# Altium PCB Placa 2.PcbDoc
Units mm, origin at the board's own origin, x right, y up, seen from the top; angles counter-clockwise.
Board outline 64 x 64 mm, 2 copper layers (Top Layer, Bottom Layer); 3 components, 4 nets, 11 pads, 0 vias.
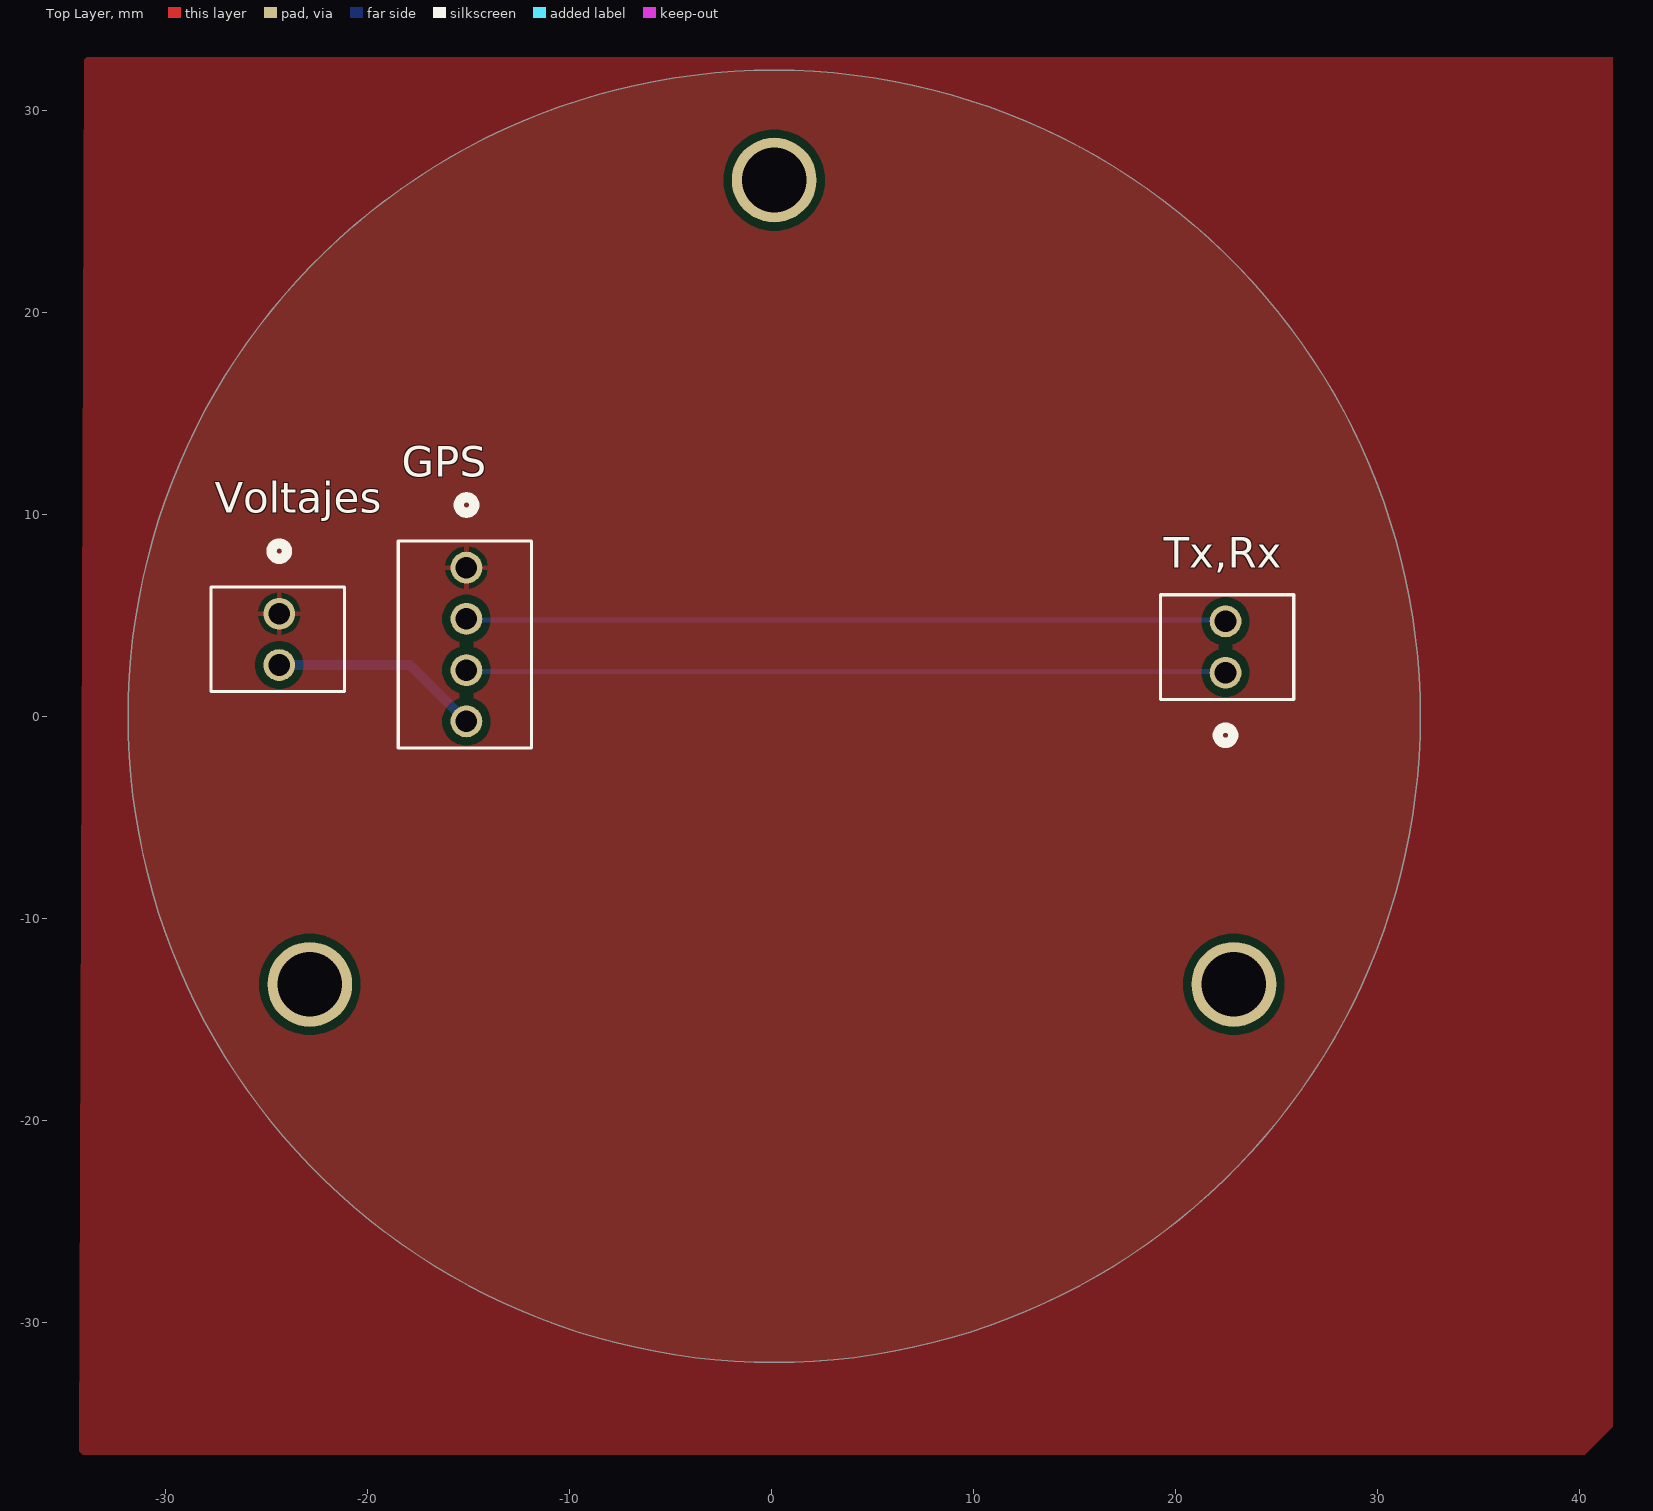
[diagram p0: Top Layer view]
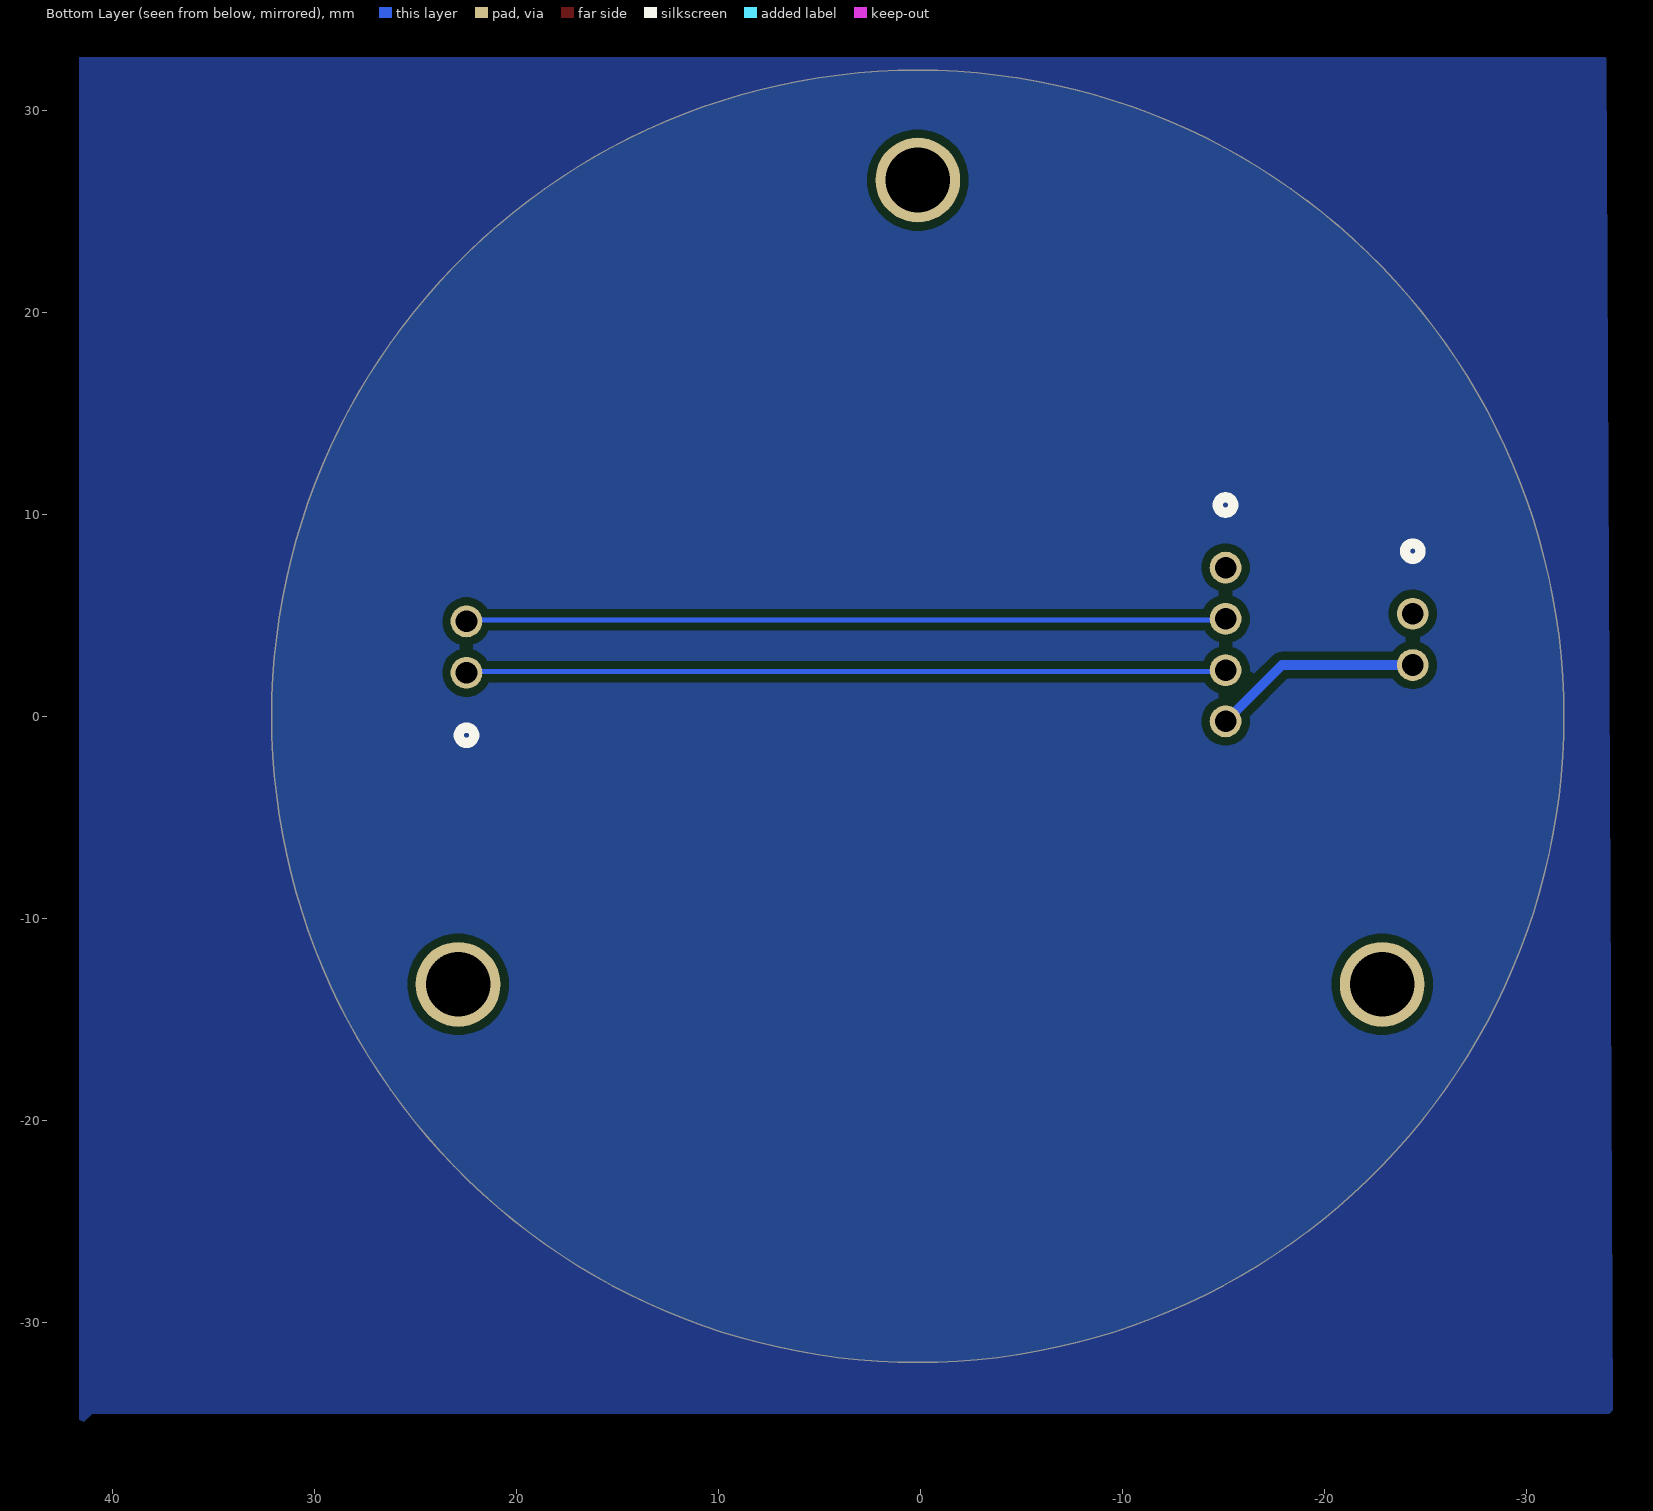
[diagram p1: Bottom Layer view, seen from below]

## Layer stack, top to bottom
Top Solder: solder mask 0.0102, Solder Resist, Dk 3.5
Top Layer: signal copper 0.0356
Dielectric 1: dielectric 0.32, FR-4, Dk 4.8
Bottom Layer: signal copper 0.0356
Bottom Solder: solder mask 0.0102, Solder Resist, Dk 3.5

## Board outline
-31.873,0 ccw(c0.127,0) 0.127,-32 ccw(c0.127,0) 32.127,0 ccw(c0.127,0) 0.127,32 ccw(c0.127,0)

## Design rules (kind name [scope] priority, off if disabled: settings)
Clearance [All] p1: gap=0.4 ignorepadtopadclearanceinfootprint=FALSE
HoleSize [All] p1: absolutevalues=TRUE maxlimit=6 minlimit=0.025 maxpercent=80.000 minpercent=20.000
PolygonConnect [All] p1: connectstyle=Relief reliefconductorwidth=0.254 reliefentries=4 polygonreliefangle="90 Angle" airgapwidth=0.254
RoutingVias [All] p1: holewidth=0.711 width=1.27 viastyle="Through Hole" minholewidth=0.711 minwidth=1.27 maxholewidth=0.711 maxwidth=1.27
SolderMaskExpansion [All] p1: expansion=0 istentingtop=FALSE
Width [All] p1: maxlimit=0.5 minlimit=0.254 preferedwidth=0.5
29 further rules are at their usual default settings.

## Components (designator, comment, footprint, x,y, rotation, side; value= is the part's Value field where it differs from the comment)
GPS "22112042" CONN_A-6373-04A_MOL -15.113,7.366 r270 top
Tx,Rx "22232021" CONN_A-6373-02A_MOL 22.479,2.159 r90 top
Voltajes "22232021" CONN_A-6373-02A_MOL -24.384,5.08 r270 top

## Footprints (in the part's own frame and the unit in brackets; to place one, negate y for a bottom-side part, rotate by r counter-clockwise, add the part's x,y. Pads: shape width x height; smd on the part's side, far side on the other; paste and mask are expansions set on the pad)
CONN_A-6373-02A_MOL [mil]
  round 62 hole 42: 1(0,0) 2(100,0)
  silkscreen extent -137,-133 152,127
CONN_A-6373-04A_MOL [mil]
  round 62 hole 42: 1(0,0) 2(100,0) 3(200,0) 4(300,0)
  silkscreen extent -137,-133 352,127

## Part data
GPS: Package=None, Availability=Unavailable, MP=22112042, Price=None
Tx,Rx Voltajes: "Connector Header Through Hole 2 position 0.100 (2.54mm)", Package=None, Check_prices=https://www.snapeda.com/parts/22232021/Molex/view-part/?ref=eda, MF=Molex, MP=22232021, SnapEDA_Link=https://www.snapeda.com/parts/22232021/Molex/view-part/?ref=snap

## Free pads (board coordinates)
  round 4.2 hole 3.2: ""(-22.87,-13.279) ""(0.127,26.558) ""(22.892,-13.279)

## Nets (pads, with @x,y where several pads share a name; then routed paths per layer and width w, separated by ;. In a path a pad name is that pad's centre, name@x,y a point inside that pad or via, vN(x,y) a via of type N, cw(c..) or ccw(c..) an arc to the next point about the centre after c; other vN are vias at no path point)
GND_GPS: GPS.1 Voltajes.1
RX: GPS.3 Tx,Rx.1 | length 37.6
  Bottom Layer w0.254: GPS.3@-15.05,2.222 22.415,2.222
  Bottom Layer w0.5: GPS.3 GPS.3@-15.05,2.222 ; 22.415,2.222 22.479,2.159
TX: GPS.2 Tx,Rx.2 | length 37.6
  Bottom Layer w0.254: GPS.2@-15.05,4.763 22.415,4.763
  Bottom Layer w0.5: GPS.2 GPS.2@-15.05,4.763 ; 22.415,4.763 22.479,4.699
VIN_GPS: GPS.4 Voltajes.2 | length 10.4
  Bottom Layer w0.5: Voltajes.2 -17.907,2.54 GPS.4

## Polygon pours and split planes (outlines as drawn)
no net on Bottom Layer "NONET_L01_P-001" (solid, pour order 1): -33.972,32.575 -33.909,32.639 41.656,32.639 41.656,-35.179 41.021,-34.544 -34.29,-34.544
GND_GPS on Top Layer "NONET_L01_P-001" (solid, pour order 0): -34.036,32.512 -33.909,32.639 41.656,32.639 41.656,-35.179 40.259,-36.576 -34.29,-36.576

## Silkscreen, mask and mechanical layers (free items; w line width, h text height)
Mechanical 1:
  circle w0.254: c0.127,0 r32